# EAGLE board led-cpu-rev2 (EAGLE 6.4)
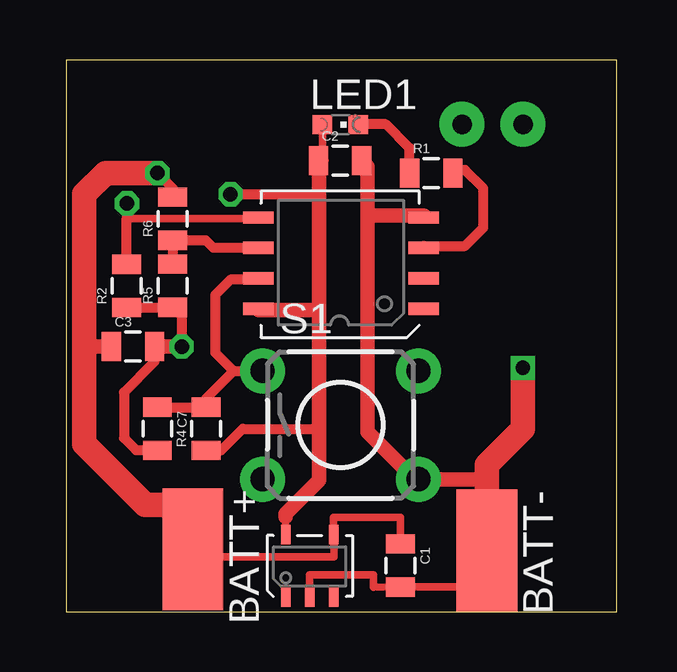
[diagram p0: board, top side]
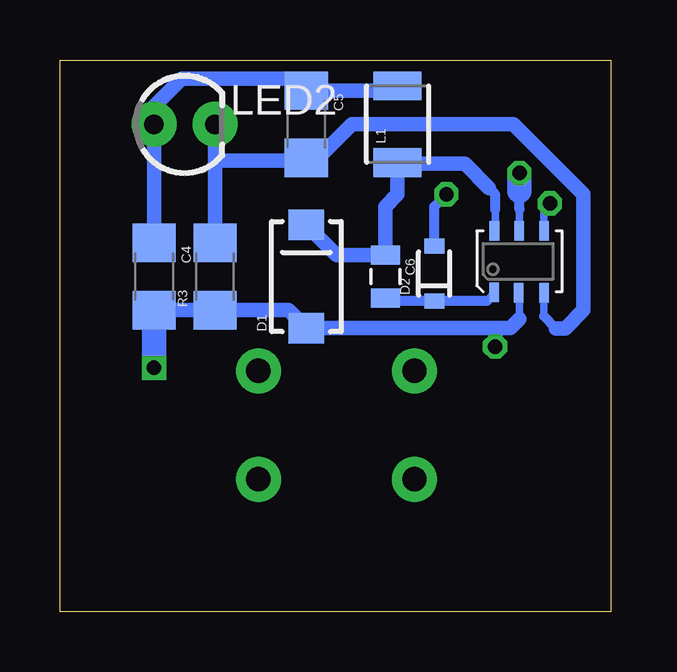
[diagram p1: board, bottom side, seen from below]

Size 22.97 x 23 mm. Coordinates in mm from the lower left corner, seen from the top.
Outline: 0,0 22.97,0 22.97,23 0,23 0,0
Copper layers (1*16): Top 0.035mm / dielectric 1.5mm / Bottom 0.035mm
Design rules "default": minimum track width 10mil, minimum drill 24mil, track to track 8mil, track to pad 8mil, pad to pad 8mil, via to via 8mil, smd to smd 8mil, copper to edge 40mil, drill to drill 8mil, minimum pad ring 10mil, minimum via ring 8mil, stop-mask expansion 4mil, vias tented up to drill 0mil, thermal gap 10mil
tKeepout: area 0,0 to 3.8,3.8; area 19.2,0 to 23,3.8; area 20,19 to 23,23; area 0,19 to 3,23
bKeepout: area 0,0 to 4,4; area 18.9,0 to 22.9,4; area 18.9,18.9 to 22.9,22.9; area 0,19 to 4,23

## Footprints (pad centres in the part's own frame; a part is rotated, then mirrored left to right if it is on the bottom)
SMD2,54-5,08 = smd 2.54 x 5.08: 1 0,0
0805 = smd 0.8 x 1.2: 1 -0.9,0; 2 0.9,0
1206 = smd 1.6 x 1.8: 1 -1.4,0; 2 1.4,0
SMA-DIODE = smd 1.27 x 1.47: A -2.15,0; C 2.15,0
SOD-323 = smd 0.63 x 0.83: 1 -1.15,0; 2 1.15,0
1210 = smd 1.2 x 2: 1 -1.6,0; 2 1.6,0
CHIPLED_0603 = smd 0.8 x 0.8: A 0,-0.75; C 0,0.75
LED3MM = drill 0.813 pad 1.88: A -1.27,0; K 1.27,0
TACTILE-PTH = drill 1.016 pad 1.88: 1 -3.251,2.261; 2 3.251,2.261; 3 -3.251,-2.261; 4 3.251,-2.261
SOT-23-5 = smd 0.406 x 0.813: 1 -1,-1.3; 2 0,-1.3; 3 1,-1.3; 4 1,1.3; 5 -1,1.3
WSOIC-8 = smd 0.508 x 1.27: 1 -1.855,-3.486; 2 -0.585,-3.486; 3 0.685,-3.486; 4 1.955,-3.486; 5 1.955,3.413; 6 0.685,3.413; 7 -0.585,3.413; 8 -1.855,3.413
TSOT-6 = smd 0.406 x 0.813: 1 -1.06,-1.3; 2 -0.04,-1.32; 3 1.02,-1.32; 4 1.02,1.27; 5 -0.02,1.27; 6 -1.05,1.28

## Placement (x,y rotation side)
BATT+  [SMD2,54-5,08]  5.29,2.6 180 top
BATT-  [SMD2,54-5,08]  17.54,2.56 180 top
C1  10uF, 16v  [0805]  13.95,1.92 270 top
C2  0.1uF  [0805]  11.43,18.8 0 top
C3  10uF, 16v  [0805]  2.79,11.05 0 top
C4  1uF  [1206]  19.05,13.97 270 bottom
C5  1uF  [1206]  12.7,20.32 270 bottom
C6  10nF  [0805]  9.4,13.97 270 bottom
C7  1uF  [0805]  3.81,7.62 270 top
D1  [SMA-DIODE]  12.7,13.97 90 bottom
D2  [SOD-323]  7.37,14.1 90 bottom
L1  4.7uH  [1210]  8.89,20.32 90 bottom
LED1  D1  [CHIPLED_0603]  11.43,20.3 270 top
LED2  [LED3MM]  17.78,20.32 0 bottom
R1  470  [0805]  15.23,18.28 0 top
R2  10k  [0805]  2.52,13.58 90 top
R3  0.2  [1206]  16.51,13.97 90 bottom
R4  10k  [0805]  5.84,7.62 90 top
R5  15k  [0805]  4.45,13.59 90 top
R6  68k  [0805]  4.45,16.38 90 top
S1  [TACTILE-PTH]  11.44,7.78 0 top
U1  TPS71550  [SOT-23-5]  10.16,1.91 0 top
U2  ATTINY13  [WSOIC-8]  11.43,14.48 90 top
U$1  LM3405TSOT-6  [TSOT-6]  3.81,14.61 0 bottom

## Library data of the parts
BATT+ BATT- = wirepad
C1-C7 = SparkFun-Capacitors
D1 D2 = SparkFun-DiscreteSemi
L1 = SparkFun-Passives
LED1 = led
LED2 = SparkFun-LED
R1 R2 R4-R6 S1 = SparkFun
R3 = SparkFun-Resistors
U1 U2 U$1 = Synapseware

## Nets
BATT+: BATT+.1 C1.1 C3.1 R6.2 U1.4 U$1.5
GND: BATT-.1 C1.2 C2.2 C3.2 C4.2 C7.2 D1.A R2.1 R3.1 R5.1 S1.4 U1.2 U2.4 U$1.2
IND_LED_B: R1.2 U2.3
N$1: LED1.C R1.1
N$2: C5.2 LED2.K R3.2 U$1.3
N$3: C6.1 D1.C L1.1 U$1.6
N$4: C6.2 D2.1 U$1.1
N$5: C4.1 C5.1 L1.2 LED2.A
PWM_OUT: R2.2 U2.5 U$1.4
PWR_SW: C7.1 R4.2 S1.1 U2.7
VCC: C2.1 D2.2 LED1.A R4.1 U1.5 U2.8
VDIV: R5.2 R6.1 U2.6

## Tracks (layer width: path | path; a pad name or v marks a point on that pad's centre or on a via)
BATT+  (via drill 0.6)
  Top 0.305: 5.46,2.29 11.18,2.29 11.18,3.19 11.16,3.19 U1.4 11.16,3.92 11.18,3.94 13.95,3.94 C1.1
  Top 0.406: R6.2 4.45,17.65 v3.81,18.29
  Top 0.61: BATT+.1 5.29,2.33 5.46,2.29 | C3.1 0.76,11.05
  Top 1.016: BATT+.1 5.29,3.35 4.19,4.45 3.3,4.45 0.76,6.99 0.76,11.05 0.76,17.4 1.65,18.29 v3.81,18.29
  Bottom 0.305: U$1.5 3.81,15.88 3.81,16.76
  Bottom 0.406: 3.81,16.76 3.81,17.53
  Bottom 1.016: 3.81,17.53 v3.81,18.29
GND  (via drill 0.6)
  Top 0.305: U1.2 10.16,1.52 12.83,1.52 12.83,1.02 C1.2 17.52,1.02 | 14.92,16.51 U2.4 15.24,16.43
  Top 0.406: 4.81,10.94 v4.83,11.05 4.83,12.32 R5.1 4.43,12.68 R2.1 | C7.2 3.8,6.73 2.92,6.73 2.41,7.24 2.41,9.14 3.68,10.41 3.68,11.04 C3.2
  Top 0.61: 17.52,1.02 17.53,1.02 17.53,2.54 BATT-.1 | C3.2 v4.83,11.05 | 17.54,5.52 S1.4 14.55,5.52 12.57,7.49 12.57,16.51 | 12.57,16.51 12.57,18.55 C2.2 | 14.92,16.51 12.57,16.51
  Top 1.016: BATT-.1 17.54,5.52 17.54,6.11 19.05,7.62 v19.05,10.16
  Bottom 0.305: 3.81,12.19 3.81,13.12 U$1.2
  Bottom 0.61: C4.2 R3.1 13.45,12.57 D1.A 4.83,11.82 | 3.81,12.19 4.2,11.82 4.83,11.82 | v4.83,11.05 4.83,11.82
  Bottom 1.016: C4.2 v19.05,10.16
IND_LED_B
  Top 0.305: 14.92,15.24 U2.3
  Top 0.406: 14.92,15.24 16.64,15.24 17.4,16 17.4,17.65 16.64,18.41 16.26,18.41 R1.2
N$1
  Top 0.406: R1.1 14.33,19.33 13.34,20.32 12.2,20.32 LED1.C
N$2
  Bottom 0.305: 2.79,12.32 U$1.3
  Bottom 0.406: 2.29,11.81 2.79,12.32
  Bottom 0.61: LED2.K 16.51,18.8 | 16.51,18.8 12.82,18.8 C5.2 12.2,18.92 10.79,20.32 4.06,20.32 1.14,17.4 1.14,12.57 1.91,11.81 2.29,11.81 | R3.2 16.51,18.8
N$3
  Bottom 0.305: U$1.6 4.83,15.88 4.83,16.76
  Bottom 0.406: 4.83,16.76 4.83,17.4 5.08,17.65
  Bottom 0.61: D1.C 11.45,14.87 C6.1 9.4,16.89 8.89,17.4 L1.1 | 8.81,18.8 L1.1 | 5.08,17.65 6.1,18.67 8.84,18.67 L1.1
N$4
  Bottom 0.305: C6.2 9.4,12.95 | 5.15,12.95 U$1.1
  Bottom 0.406: 5.15,12.95 D2.1 9.28,12.95 C6.2
N$5
  Bottom 0.61: C4.1 LED2.A 19.05,21.08 17.91,22.23 13.21,22.23 C5.1 9.09,21.72 L1.2
PWM_OUT  (via drill 0.6)
  Top 0.305: U2.5 7.97,16.38 2.54,16.38 | v2.54,17.02 2.54,16.51
  Top 0.406: 2.54,16.51 2.54,16.38 2.52,16.36 R2.2
  Bottom 0.305: U$1.4 2.79,16.77 v2.54,17.02
PWR_SW
  Top 0.406: C7.1 R4.2 5.84,8.89 6.99,10.03 | U2.7 7.97,13.84 6.86,13.84 6.22,13.21 6.22,10.79 6.99,10.03 | 6.99,10.03 S1.1
VCC  (via drill 0.6)
  Top 0.305: C2.1 10.68,18.8 | 8.02,12.57 U2.8 7.97,12.57 | U1.5 9.16,3.95 | 10.79,18.8 10.68,18.8 | 10.68,18.8 LED1.A
  Top 0.406: R4.1 6.47,6.72 7.37,7.62 10.54,7.62 | v6.86,17.4 10.29,17.4 10.54,17.14
  Top 0.61: 9.16,3.95 9.16,4.08 10.54,5.46 10.54,7.62 10.54,12.57 | 8.02,12.57 10.54,12.57 | 10.54,12.57 10.54,17.14 10.54,18.4 C2.1
  Bottom 0.406: D2.2 7.36,16.14 7.37,16.64 7.37,16.89 v6.86,17.4
VDIV
  Top 0.406: R5.2 R6.1 5.83,15.48 6.15,15.16 U2.6